# Altium PCB PCB1.PcbDoc
Units mil, origin at the board's own origin, x right, y up, seen from the top; angles counter-clockwise.
Board outline 4535 x 2760 mil, 2 copper layers (Top Layer, Bottom Layer); 63 components, 60 nets, 319 pads, 63 vias.
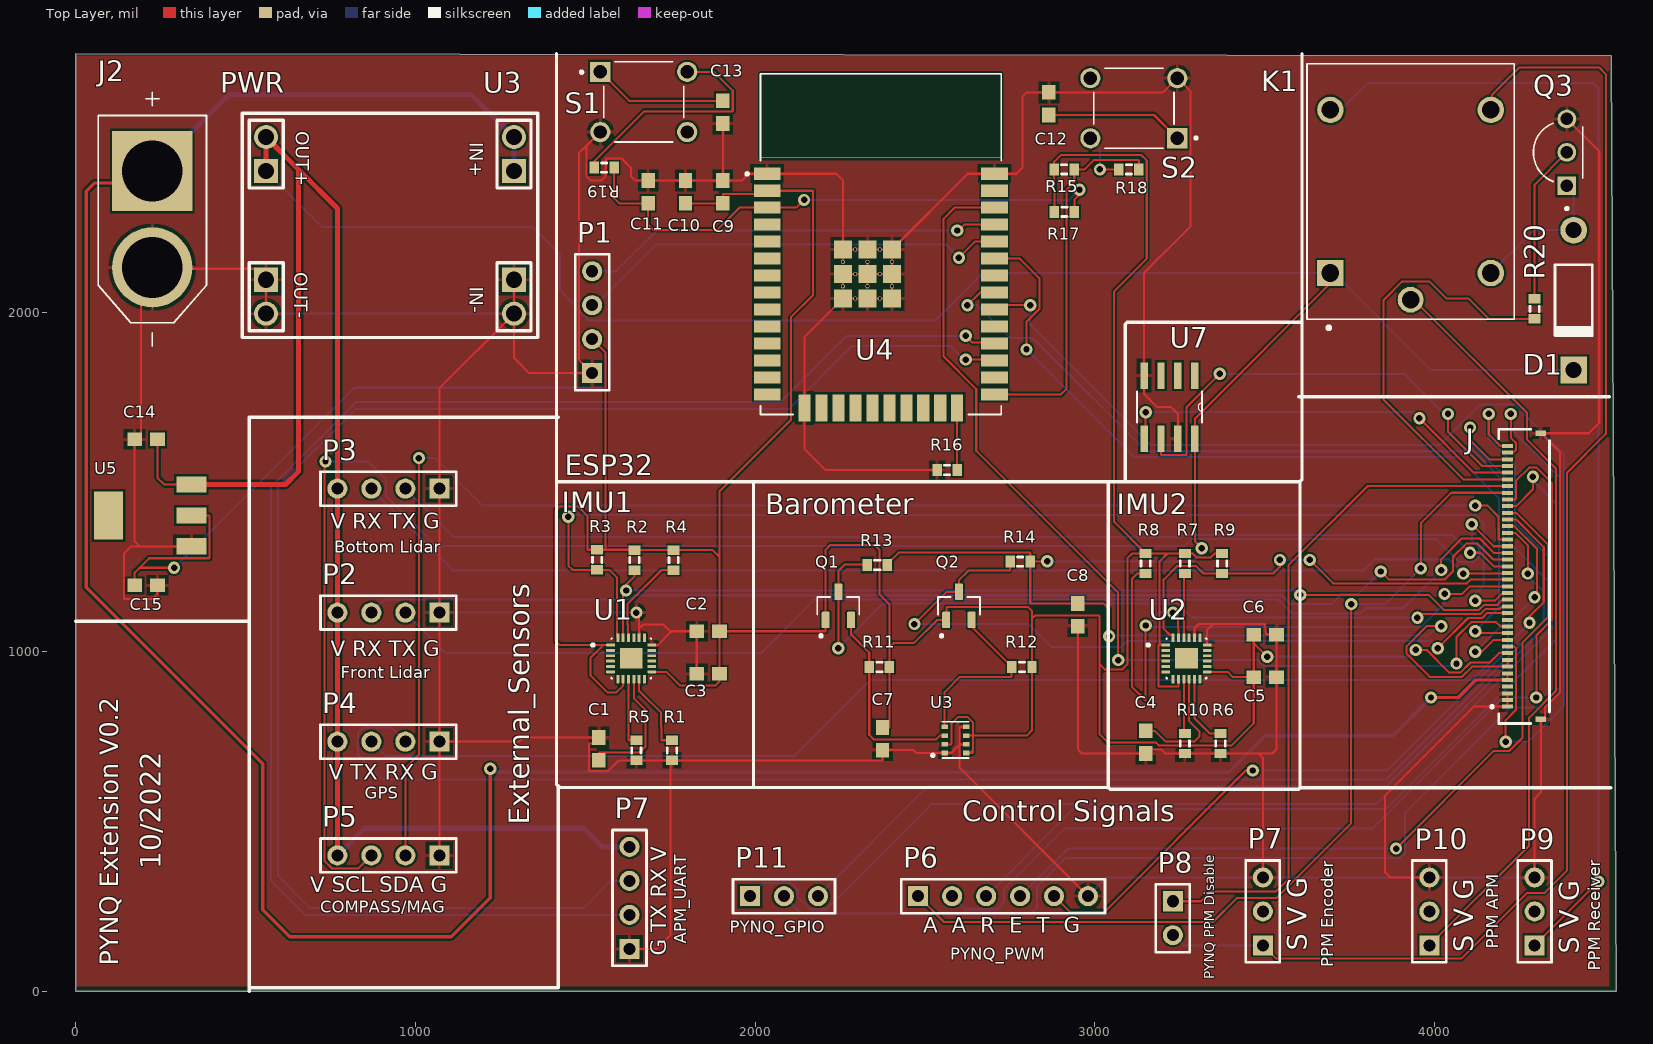
[diagram p0: Top Layer view]
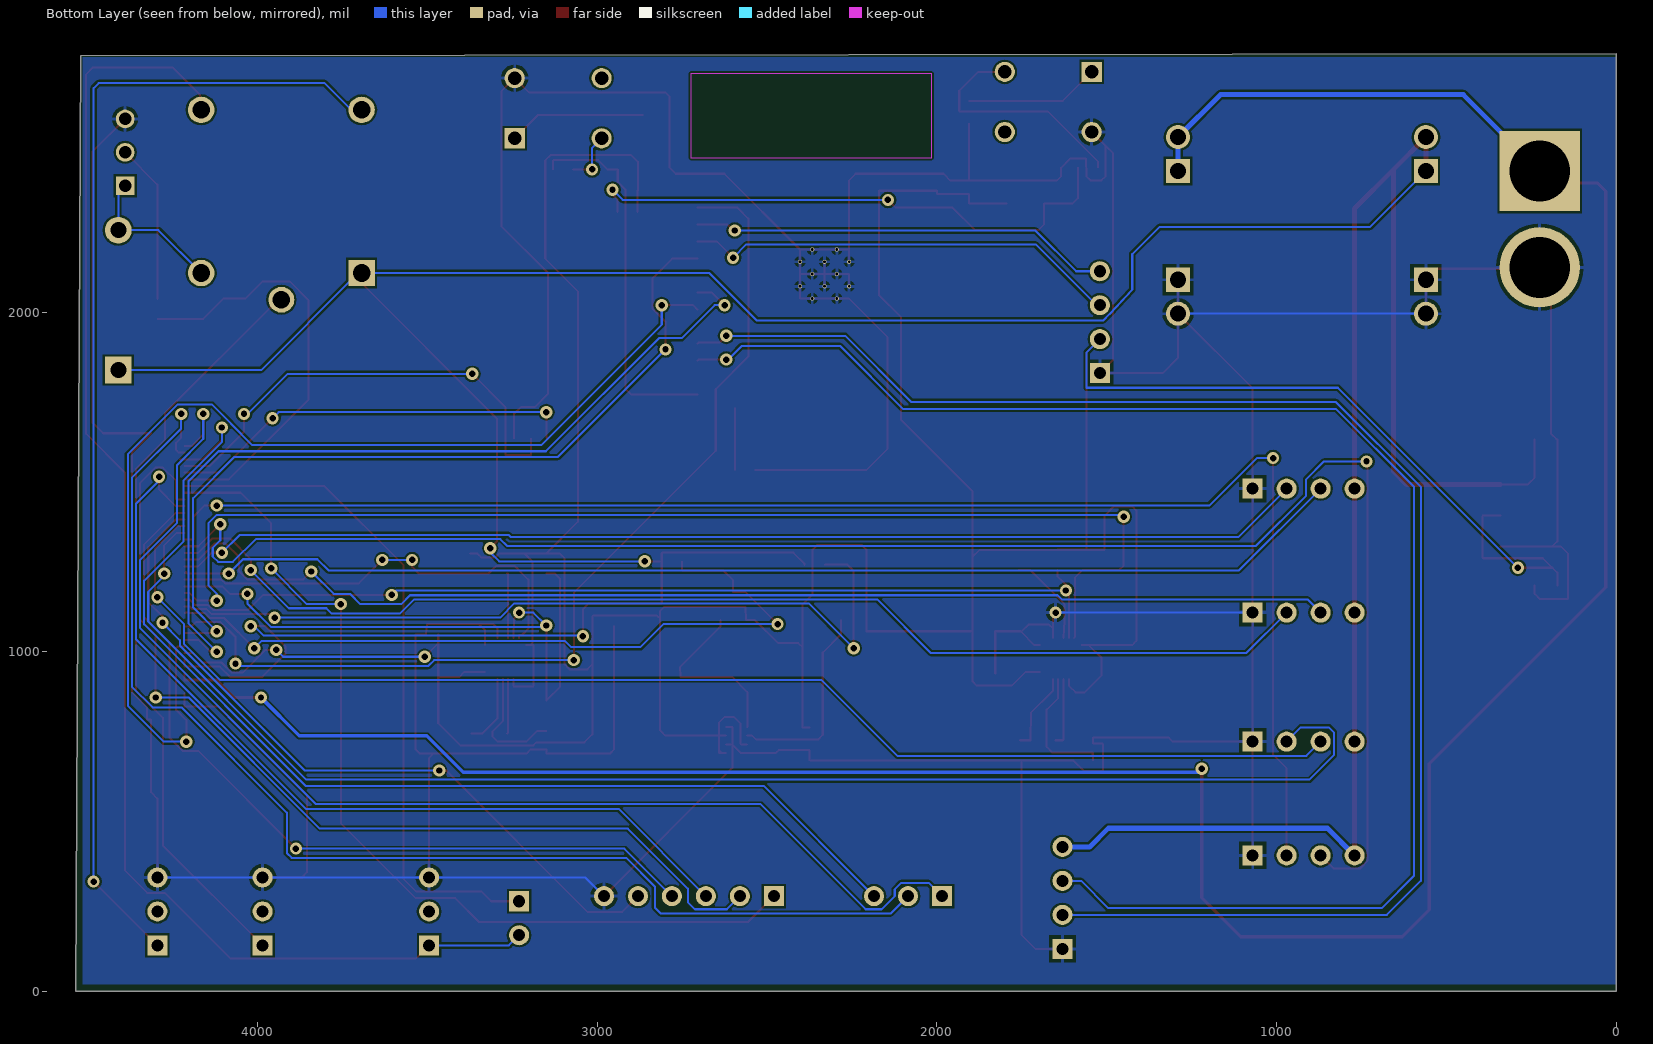
[diagram p1: Bottom Layer view, seen from below]

## Layer stack, top to bottom
Top Solder: solder mask 0.4, Solder Resist, Dk 3.5
Top Layer: signal copper 1.4
Dielectric 1: dielectric 12.6, FR-4, Dk 4.8
Bottom Layer: signal copper 1.4
Bottom Solder: solder mask 0.4, Solder Resist, Dk 3.5

## Board outline
0,0 4535,0 4520,2755 0,2760

## Design rules (kind name [scope] priority, off if disabled: settings)
Clearance [All] p1: gap=6 ignorepadtopadclearanceinfootprint=FALSE except(0: Arc-Hole Track-Hole SMDPad-Hole THPad-Hole Via-Hole Fill-Hole Poly-Hole Region-Hole Text-Hole)
MinimumSolderMaskSliver [All] p1: minsoldermaskwidth=3.8
PolygonConnect [All] p1: connectstyle=Relief reliefconductorwidth=10 reliefentries=4 polygonreliefangle="90 Angle" airgapwidth=10
RoomDefinition Sheet1 [InComponentClass('Sheet1')] p1 off: confinementstyle=ConfineIn formatcopy=TRUE lockcomponents=FALSE outline 4665,1570 8030,1570 8030,2485 4665,2485
RoomDefinition ESP32 [InComponentClass('ESP32')] p2 off: confinementstyle=ConfineIn formatcopy=TRUE lockcomponents=FALSE outline 4665,0 8390,0 8390,1160 4665,1160
RoomDefinition Voltage_Regulators [InComponentClass('Voltage_Regulators')] p3 off: confinementstyle=ConfineIn formatcopy=TRUE lockcomponents=FALSE outline 4665,2535 6880,2535 6880,3630 4665,3630
RoomDefinition Sensors [InComponentClass('Sensors')] p4 off: confinementstyle=ConfineIn formatcopy=TRUE lockcomponents=FALSE outline 4665,1210 10145,1210 10145,1520 4665,1520
RoutingVias [All] p1: holewidth=19 width=36 viastyle="Through Hole" minholewidth=18 minwidth=33 maxholewidth=28 maxwidth=50
SilkToSilkClearance [All] p1: silktosilkclearance=5
SilkToSolderMaskClearance [IsPad] p1: minsilkscreentomaskgap=3 clearancetoexposedcopper=TRUE
SolderMaskExpansion [All] p1: expansion=4 istentingtop=FALSE
Width [All] p1: maxlimit=15 minlimit=4.5 preferedwidth=6 minimp=50.000000 maximp=50.000000 favimp=50.000000
27 further rules are at their usual default settings.

## Classes and differential pairs
component class Voltage_Regulators: C14 C15 J2 U3 U5
component class Sheet1: D1 J K1 P2 P3 P4 P5 P6 P7 P8 P9 P10 P11 Q3 R20
component class Sensors: C1 C2 C3 C4 C5 C6 C7 C8 Q1 Q2 R1 R2 R3 R4 R5 R6 R7 R8 R9 R10 R11 R12 R13 R14 U1 U2 U3 U7
component class ESP32: C9 C10 C11 C12 C13 P1 R15 R16 R17 R18 R19 S1 S2 U4

## Components (designator, comment, footprint, x,y, rotation, side; value= is the part's Value field where it differs from the comment)
C1 "0.1uF" CAPC1608X90 1540,713.46 r90 top
C2 "0.1uF" CAPC1608X90 1861.53,1060 r180 top
C3 "0.01uF" CAPC1608X90 1861.54,935 r180 top
C4 "0.1uF" CAPC1608X90 3150,733.46 r270 top
C5 "0.01uF" CAPC1608X90 3501.54,925 r0 top
C6 "0.1uF" CAPC1608X90 3501.54,1050 r0 top
C7 "10uF" CAPC1608X90 2375,743.46 r270 top
C8 "10uF" CAPC1608X90 2950,1108.47 r270 top
C9 "100uF/6.3V" CAPC1608X90 1905,2353.47 r270 top
C10 "1uF/10V" CAPC1608X90 1795,2353.46 r270 top
C11 "0.1uf" CAPC1608X90 1685,2353.46 r90 top
C12 "0.1uf" CAPC1608X90 2865,2613.46 r90 top
C13 "0.1uf" CAPC1608X90 1905,2588.46 r270 top
C14 "10uF" CAPC1608X90 206.54,1625 r180 top
C15 "10uF" CAPC1608X90 206.54,1195 r0 top
D1 "Diode 1N4001" DO-41 4410,2035 r270 top
J "FFC2B28-40-G" GCT_FFC2B28-40-G 4264.21,1221.73 r90 top
J2 "XT60-M" AMASS_XT60-M 225,2273.27 r270 top
K1 "SRD-05VDC-SL-C" RELAY_SRD-05VDC-SL-C 3930,2355 r90 top
P1 "ESP_UART" HDR1X4 1520,1820 r90 top
P2 "Lidar_F" HDR1X4 1070,1115 r180 top
P3 "Lidar_B" HDR1X4 1070,1480 r180 top
P4 "GPS_Prim" HDR1X4 1070,735 r180 top
P5 "Compass_Prim" HDR1X4 1070,400 r180 top
P6 "PWM_PYNQ" HDR1X6 2480,280 r0 top
P7 "APM_UART" HDR1X4 1630,125 r90 top
P7 "PPM_PYNQ_Encoder" HDR1X3 3495,135 r90 top
P8 "PPM_Jumper" HDR1X2 3230,265 r270 top
P9 "PPM_REC" HDR1X3 4295,135 r90 top
P10 "PPM_OUT" HDR1X3 3985,135 r90 top
P11 "GPIO" HDR1X3 1985,280 r0 top
Q1 "BSS138" SOT95P240X111-3N 2245,1135 r90 top
Q2 "BSS138" SOT95P240X111-3N 2600,1135 r90 top
Q3 "BC547B" TO92250P510H770-3 4364.21,2470 r90 top
R1 "Res3" J1-0603 1755,709.53 r90 top value=10K
R2 "Res3" J1-0603 1645,1269.53 r270 top value=10K
R3 "Res3" J1-0603 1535,1270.47 r270 top value=10K
R4 "Res3" J1-0603 1760,1269.53 r270 top value=10K
R5 "Res3" J1-0603 1650,709.53 r90 top value=10K
R6 "Res3" J1-0603 3370,729.53 r90 top value=10K
R7 "Res3" J1-0603 3265,1259.53 r270 top value=10K
R8 "Res3" J1-0603 3150,1259.53 r270 top value=10K
R9 "Res3" J1-0603 3375,1259.53 r270 top value=10K
R10 "Res3" J1-0603 3265,729.53 r90 top value=10K
R11 "Res3" J1-0603 2365.47,955 r180 top value=10K
R12 "Res3" J1-0603 2785.47,955 r180 top value=10K
R13 "Res3" J1-0603 2359.53,1255 r0 top value=10K
R14 "Res3" J1-0603 2780.47,1265 r0 top value=10K
R15 "Res3" J1-0603 2910,2420 r180 top value=10K
R16 "Res3" J1-0603 2565.47,1535 r180 top value="5k(Optional-internal pull down)"
R17 "Res3" J1-0603 2910.47,2295 r180 top value=10K(1%)
R18 "Res3" J1-0603 3100.47,2420 r0 top value=470R(1%)
R19 "Res3" J1-0603 1555.47,2425 r0 top value=470R(1%)
R20 "0603" J1-0603 4295,2009.53 r90 top value=10K
S1 "TS02-66-73-BK-100-SCR-D" SW_TS02-66-73-BK-100-SCR-D 1672.05,2618.58 r0 top
S2 "TS02-66-73-BK-100-SCR-D" SW_TS02-66-73-BK-100-SCR-D 3115,2600 r180 top
U1 "MPU-9250" QFN40P300X300X105-25N 1635,980 r0 top
U2 "MPU-9250" QFN40P300X300X105-25N 3270,980 r0 top
U3 "Component_1" PCBComponent_1 1220,2270 r180 top
U3 "BMP280" XDCR_BMP280 2590,740 r180 top
U4 "ESP32-WROOM-32" MODULE_ESP32-WROOM-32 2370,2200 r0 top
U5 "AMS1117-3.3" SOT223 218,1401 r180 top
U7 "24LC256-I/SN" SOIC127P600X175-8N 3220,1720 r270 top

## Footprints (in the part's own frame and the unit in brackets; to place one, negate y for a bottom-side part, rotate by r counter-clockwise, add the part's x,y. Pads: shape width x height; smd on the part's side, far side on the other; paste and mask are expansions set on the pad)
AMASS_XT60-M [mm]
  round 6 hole 4.55: N(3.6,0)
  rect 6x6 hole 4.55: P(-3.6,0)
  silkscreen extent -9.5,-4.05 9.5,4.05, body extent -4.05,0 4.05,20.5, height 7.75
CAPC1608X90 [mm]
  rect 1.1x1 smd: 1(-0.85,0) 2(0.85,0)
DO-41 [mm] "Diode, Axial; Body 5.2 x 2.7 mm (LxDia. max), Lead Dia. 0.86 mm (max)"
  round 2 hole 1.2: 1(-5.23,0)
  rect 2x2 hole 1.2: 2(5.23,0)
  silkscreen extent -2.65,-1.4 2.75,1.4
GCT_FFC2B28-40-G [mm]
  rect 0.3x0.8 smd: 1(-9.75,1.25) 2(-9.25,1.25) 3(-8.75,1.25) 4(-8.25,1.25) 5(-7.75,1.25) 6(-7.25,1.25) 7(-6.75,1.25) 8(-6.25,1.25) 9(-5.75,1.25) 10(-5.25,1.25) 11(-4.75,1.25) 12(-4.25,1.25) 13(-3.75,1.25) 14(-3.25,1.25) 15(-2.75,1.25) 16(-2.25,1.25) 17(-1.75,1.25) 18(-1.25,1.25) 19(-0.75,1.25) 20(-0.25,1.25) 21(0.25,1.25) 22(0.75,1.25) 23(1.25,1.25) 24(1.75,1.25) 25(2.25,1.25) 26(2.75,1.25) 27(3.25,1.25) 28(3.75,1.25) 29(4.25,1.25) 30(4.75,1.25) 31(5.25,1.25) 32(5.75,1.25) 33(6.25,1.25) 34(6.75,1.25) 35(7.25,1.25) 36(7.75,1.25) 37(8.25,1.25) 38(8.75,1.25) 39(9.25,1.25) 40(9.75,1.25)
  rect 0.4x0.8 smd: S1(-10.7,-1.25) S2(10.7,-1.25)
  silkscreen extent -11,-1.9 11,2.5
HDR1X2 [mm] "Connector; Header; 2 Position"
  rect 1.5x1.5 hole 0.9: 1(0,0)
  round 1.5 hole 0.9: 2(2.54,0)
  silkscreen extent -1.27,-1.27 3.81,1.27
HDR1X3 [mm] "Connector; Header; 3 Position"
  rect 1.5x1.5 hole 0.9: 1(0,0)
  round 1.5 hole 0.9: 2(2.54,0) 3(5.08,0)
  silkscreen extent -1.27,-1.27 6.35,1.27
HDR1X4 [mm] "Connector; Header; 4 Position"
  rect 1.5x1.5 hole 0.9: 1(0,0)
  round 1.5 hole 0.9: 2(2.54,0) 3(5.08,0) 4(7.62,0)
  silkscreen extent -1.27,-1.27 8.89,1.27
HDR1X6 [mm] "Connector; Header; 6 Position"
  rect 1.5x1.5 hole 0.9: 1(0,0)
  round 1.5 hole 0.9: 2(2.54,0) 3(5.08,0) 4(7.62,0) 5(10.16,0) 6(12.7,0)
  silkscreen extent -1.27,-1.27 13.97,1.27
J1-0603 [mm] "Chip Resistor, Body 1.6x0.8mm, IPC High Density"
  rect 0.7x0.9 smd: 1(-0.75,0) 2(0.75,0)
  silkscreen extent -0.2,-0.35 0.2,0.35, body extent -0.85,-0.48 0.85,0.48, height 0.9
MODULE_ESP32-WROOM-32 [mm]
  rect 2x0.9 smd: 1(-8.5,5.26) 2(-8.5,3.99) 3(-8.5,2.72) 4(-8.5,1.45) 5(-8.5,0.18) 6(-8.5,-1.09) 7(-8.5,-2.36) 8(-8.5,-3.63) 9(-8.5,-4.9) 10(-8.5,-6.17) 11(-8.5,-7.44) 12(-8.5,-8.71) 13(-8.5,-9.98) 14(-8.5,-11.25) 25(8.5,-11.25) 26(8.5,-9.98) 27(8.5,-8.71) 28(8.5,-7.44) 29(8.5,-6.17) 30(8.5,-4.9) 31(8.5,-3.63) 32(8.5,-2.36) 33(8.5,-1.09) 34(8.5,0.18) 35(8.5,1.45) 36(8.5,2.72) 37(8.5,3.99) 38(8.5,5.26)
  rect 0.9x2 smd: 15(-5.715,-12.25) 16(-4.445,-12.25) 17(-3.175,-12.25) 18(-1.905,-12.25) 19(-0.635,-12.25) 20(0.635,-12.25) 21(1.905,-12.25) 22(3.175,-12.25) 23(4.445,-12.25) 24(5.715,-12.25)
  rect 1.33x1.33 smd: 39_1(-2.835,-0.405) 39_2(-1,-0.405) 39_3(0.835,-0.405) 39_4(-2.835,-2.24) 39_5(-1,-2.24) 39_6(0.835,-2.24) 39_7(-2.835,-4.075) 39_8(-1,-4.075) 39_9(0.835,-4.075)
  round 0.3 hole 0.2: 39_10(-1.917,-0.405) 39_11(-0.082,-0.405) 39_12(-2.835,-1.322) 39_13(-1,-1.322) 39_14(0.835,-1.322) 39_15(-1.917,-2.24) 39_16(-0.082,-2.24) 39_17(-2.835,-3.157) 39_18(-1,-3.157) 39_19(0.835,-3.157) 39_20(-1.917,-4.075) 39_21(-0.082,-4.075)
  Keep-Out Layer region: 9,6.45 -9,6.45 -9,12.75 9,12.75
  Keep-Out Layer region: 9,6.45 -9,6.45 -9,12.75 9,12.75
  silkscreen extent -10.1,-12.75 9,12.75
PCBComponent_1 [mm]
  round 1.8 hole 1.2: 1(-1.778,6.985) 4(-1.778,-6.223) 5(16.764,6.985) 8(16.764,-6.223)
  rect 1.8x1.8 hole 1.2: 2(-1.778,4.445) 3(-1.778,-3.683) 6(16.764,4.445) 7(16.764,-3.683)
  silkscreen extent -3.56,-8 18.54,8.76
QFN40P300X300X105-25N [mm]
  rrect25% 0.64x0.22 smd: 1(-1.545,1) 2(-1.545,0.6) 3(-1.545,0.2) 4(-1.545,-0.2) 5(-1.545,-0.6) 6(-1.545,-1) 13(1.545,-1) 14(1.545,-0.6) 15(1.545,-0.2) 16(1.545,0.2) 17(1.545,0.6) 18(1.545,1)
  rrect25% 0.22x0.64 smd: 7(-1,-1.545) 8(-0.6,-1.545) 9(-0.2,-1.545) 10(0.2,-1.545) 11(0.6,-1.545) 12(1,-1.545) 19(1,1.545) 20(0.6,1.545) 21(0.2,1.545) 22(-0.2,1.545) 23(-0.6,1.545) 24(-1,1.545)
  rect 1.7x1.54 smd paste-2: 25(0,0)
  silkscreen extent -2.96,-1.5 1.5,1.5, body extent -1.5,-1.5 1.5,1.5, height 1
RELAY_SRD-05VDC-SL-C [mm]
  rect 1.98x1.98 hole 1.32: A1(-6.1,6)
  round 1.98 hole 1.32: A2(-6.1,-6) NC(6.1,6) NO(6.1,-6)
  round 1.935 hole 1.29: COM(-8.1,0)
  silkscreen extent -10.3,-7.75 9.55,7.75
SOIC127P600X175-8N [mil]
  rect 78x22 smd: 1(-93,75) 2(-93,25) 3(-93,-25) 4(-93,-75) 5(93,-75) 6(93,-25) 7(93,25) 8(93,75)
  silkscreen extent -46,-96 46,96
SOT95P240X111-3N [mm]
  rrect25% 1.23x0.6 smd: 1(-1.06,0.95) 2(-1.06,-0.95) 3(1.06,0)
  silkscreen extent -2.35,-1.57 0.65,1.57
SOT223 [mil]
  rect 88x48 smd: 1(-122,91) 2(-122,0) 3(-122,-91)
  rect 86.61x141.73 smd: 4(122.01,0)
SW_TS02-66-73-BK-100-SCR-D [mm]
  rect 1.508x1.508 hole 1: 1(-3.25,2.25)
  round 1.508 hole 1: 2(3.25,2.25) 3(-3.25,-2.25) 4(3.25,-2.25)
  silkscreen extent -4.75,-3 3,3
TO92250P510H770-3 [mm]
  rect 1.4x1.4 hole 0.93: 1(-2.5,-0.655)
  round 1.4 hole 0.93: 2(0,-0.655) 3(2.5,-0.655)
  silkscreen extent -4.3,-1.85 2.18,1.85
XDCR_BMP280 [mm]
  rect 0.5x0.35 smd: 1(0.8,0.975) 2(0.8,0.325) 3(0.8,-0.325) 4(0.8,-0.975) 5(-0.8,-0.975) 6(-0.8,-0.325) 7(-0.8,0.325) 8(-0.8,0.975)
  silkscreen extent -1,-1.35 1.79,1.35

## Part data
C1 C2 C3 C4 C5 C6 C7 C8 C9 C10 C11 C12 C13 C14 C15: library part C0603C104K5RACTU, "0.1ÂµF Â±10% 50V Ceramic Capacitor X7R 0603 (1608 Metric)", Package="0603 Kemet", Check_prices=https://www.snapeda.com/parts/C0603C104K5RACTU/KEMET/view-part/52584/?ref=eda, Digi-Key_Part_Number=399-5089-1-ND, MF=KEMET, MP=C0603C104K5RACTU, Purchase-URL=https://pricing.snapeda.com/search/part/C0603C104K5RACTU/?ref=eda, SnapEDA_Link=https://www.snapeda.com/parts/C0603C104K5RACTU/KEMET/view-part/52584/?ref=snap
D1: "1 Amp General Purpose Rectifier", Code_JEDEC=DO-204-AL, ComponentLink1Description="Manufacturer Link", ComponentLink1URL=http://www.fairchildsemi.com/, ComponentLink2Description=Datasheet, ComponentLink2URL=http://www.fairchildsemi.com/ds/1N%2F1N4001.pdf, DatasheetVersion=1998, LatestRevisionDate=17-Jul-2002, LatestRevisionNote="Re-released for DXP Platform.", PackageDescription="Diode, Axial; Body 5.2 x 2.7 mm (LxDia. max), Lead Dia. 0.86 mm (max)", PackageReference=DO-41, PackageVersion=Aug-1999, Published=8-Jun-2000, Publisher="Altium Limited"
J: "40 Position FFC, FPC Connector Contacts, Top and Bottom 0.020 _0.50mm_ Surface Mount, Right Angle", Package="Package Analog Devices", Availability=Unavailable, MF="Global Connector Technology", MP=FFC2B28-40-G, Price=None, SnapEDA_Link=https://www.snapeda.com/parts/FFC2B28-40-G/Global%20Connector%20Technology/view-part/4223068/?ref=snap
J2: "Plug; DC supply; XT60; male; PIN: 2; for cable; soldered; 30A; 500V", Package=Package, Availability="Not in stock", Check_prices=https://www.snapeda.com/parts/XT60-M/AMASS/view-part/?ref=eda, MF=AMASS, MP=XT60-M, Price=None, SnapEDA_Link=https://www.snapeda.com/parts/XT60-M/AMASS/view-part/?ref=snap
K1: "5V Trigger Relay Module For Arduino And Raspberry Pi 5V Trigger Relay Module For Arduino And Raspberry Pi", Package=None, Availability=Unavailable, MP=SRD-05VDC-SL-C, Price=None
P1 P2 P3 P4 P5 P7: library part "Header 4", "Header, 4-Pin", LatestRevisionDate=17-Jul-2002, LatestRevisionNote="Re-released for DXP Platform.", Publisher="Altium Limited"
P6: library part "Header 6", "Header, 6-Pin", LatestRevisionDate=17-Jul-2002, LatestRevisionNote="Re-released for DXP Platform.", Publisher="Altium Limited"
P7 P9 P10 P11: library part "Header 3", "Header, 3-Pin", LatestRevisionDate=17-Jul-2002, LatestRevisionNote="Re-released for DXP Platform.", Publisher="Altium Limited"
P8: library part "Header 2", "Header, 2-Pin", LatestRevisionDate=17-Jul-2002, LatestRevisionNote="Re-released for DXP Platform.", Publisher="Altium Limited"
Q1 Q2: "N-Channel 50V 220mA (Ta) 360mW (Ta) Surface Mount SOT-23-3", Package=None, Availability=Unavailable, MP=BSS138, Price=None
Q3: "<a href=\"https://pricing.snapeda.com/parts/BC337-16%20A1/Taiwan%20Semiconductor/view-part?ref=eda\">Check availability</a> <a href=\"https://pricing.snapeda.com/parts/BC337-16%20A1/Taiwan%20Semiconductor/view-part?ref=eda\">Check availability</a>", Package=None, Availability=Unavailable, MP=BC547B, Price=None
R1 R2 R3 R4 R5 R6 R7 R8 R9 R10 R11 R12 R13 R14 R15 R16 R17 R18 R19: "Resistor", LatestRevisionDate=29-May-2009, LatestRevisionNote="IPC-7351 Footprint Added.", PackageDescription="Chip Resistor", PackageReference=J1-0603, Published=8-Jun-2000, Publisher="Altium Limited"
R20: library part Res3, "Resistor", LatestRevisionDate=29-May-2009, LatestRevisionNote="IPC-7351 Footprint Added.", PackageDescription="Chip Resistor", PackageReference=J1-0603, Published=8-Jun-2000, Publisher="Altium Limited"
S1 S2 U4: Package=None, Availability=Unavailable, Price=None
  S1 S2: MF="{'manufacturer': u'CUI'}", MP=TS02-66-73-BK-100-SCR-D
  U4: MP=ESP32-WROOM-32
U1 U2: "MPU-9250 series Accelerometer, Gyroscope, Humidity, Magnetometer, Pressure, Temperature Sensor Evaluation Board", Package="TFQFN-24 TDK InvenSense", Availability="In Stock", Check_prices=https://www.snapeda.com/parts/MPU-9250/TDK+InvenSense/view-part/?ref=eda, MF="TDK InvenSense", MP=MPU-9250, Price=None, Purchase-URL=https://pricing.snapeda.com/search/part/MPU-9250/?ref=eda, SnapEDA_Link=https://www.snapeda.com/parts/MPU-9250/TDK+InvenSense/view-part/?ref=snap
U3: "BMP280 Absolute Barometric Pressure Sensor for Battery Powered Devices 2 x 2.5mm", Package=None, Availability=Unavailable, MP=BMP280, Price=None
U7: "EEPROM Memory IC 256Kb _32K x 8_ IÂ²C 400kHz 900ns 8-SOIC", Package="SOIC-8 Microchip", Availability=Unavailable, MF=Microchip, MP=24LC256-I/SN, Price=None, SnapEDA_Link=https://www.snapeda.com/parts/24LC256-I/SN/Microchip/view-part/9771/?ref=snap

## Via types
v1: diameter 36, hole 19, Top Layer to Bottom Layer, 63 vias

## Nets (pads, with @x,y where several pads share a name; then routed paths per layer and width w, separated by ;. In a path a pad name is that pad's centre, name@x,y a point inside that pad or via, vN(x,y) a via of type N, cw(c..) or ccw(c..) an arc to the next point about the centre after c; other vN are vias at no path point)
+3.3V: C2.1 C3.1 C5.1 C6.1 C7.1 C9.2 C10.2 C15.1 J.9 P1.2 Q1.1 Q2.1 R2.1 R3.1 R4.1 R7.1 R8.1 R9.1 R11.1 R12.1 R15.2 R17.2 U1.1 U1.8 U1.13 U2.1 U2.8 U2.13 U3.2@2558.5,727.2 U3.6@2621.5,752.8 U3.8@2621.5,701.61 U4.2 U5.2 | length 14190.5
  Top Layer w6: C15.1 173.07,1232.57 187.5,1247 ; v1(289,1247) 187.5,1247 ; U5.2 392,1401 393,1400 393,1276 392,1275 215.5,1275 187.5,1247 ; P1.2 1559,1881 1559,1301 1558,1300 ; U1.1 1553,1019.37 ; U1.8 1611.38,900 1591.38,880 1565,880 1515,930 1515,981.37 1553,1019.37 ; U1.13 1738.37,940.63 1779,900 1882.5,900 1895,912.5 C3.1 C2.1 ; C10.2 C9.2 1905,2346 1906,2347 1999,2347 1999,2357.09 U4.2 2170,2357.09 2171,2356.09 2171,2050 2105,1984 2105,1682 1895,1472 1895,1279.06 ; C7.1 2395,776.93 R11.1 2395,1012.5 ; U3.2@2558.5,727.2 2577,727.2 2578,728.2 2578,787.5 2598.5,808 2625,808 2641,792 2641,752.8 ; U3.8@2621.5,701.61 2633,701.61 ; U3.6@2621.5,752.8 2640,752.8 ; R17.2 2880.94,2357 2880.47,2357.47 R15.2 2880.47,2442.47 2900,2462 3137.5,2462 3153,2446.5 3153,2157 3057,2061 3057,1382.06 R8.1 ; U2.1 3196.5,1019.37 ; U2.8 3246.38,898.43 3245,897.06 3188.94,897.06 3187,899 3187,1018.37 3188,1019.37 3196.5,1019.37 ; U2.13 3391,940.63 3406.63,925 C5.1 ; R9.1 3353.56,1289.06 3342,1277.5 3299.56,1277.5 3288,1289.06 R7.1 3214.15,1289.06 ; C6.1 3468.07,1025 ; v1(3508.07,985) 3468.07,1025 ; v1(3945,1005) 3976.82,1005 4043.82,938 4076.18,938 4106.18,968 4163.5,968 4190.85,995.35 J.9 ; 1553,1019.37 1425,1019.37 1412.5,1031.87 1412.5,1415 1425,1427.5 1478.5,1427.5 1506,1400 1507,1300 R3.1 1558,1300 ; 1558,1300 1644.06,1300 R2.1 R4.1 1875,1299.06 1895,1279.06 ; C2.1 1895,1279.06 ; C2.1 2206.6,1060 2207.6,1061 Q1.1 2207.6,1300 2221.6,1314 2352,1314 2366,1300 2366,1169 2395,1140 2395,1012.5 ; 2395,1012.5 2407.5,1025 2467.5,1025 2535.77,1093.27 Q2.1 2563.6,1131 2804,1131 2815,1120 2815,1097 ; 2633,701.61 2640,701.61 2641,702.61 2641,709.61 ; 2633,701.61 2641,709.61 ; 2640,752.8 2641,751.8 ; 2640,752.8 2641,752.8 ; 2641,709.61 2641,751.8 ; 2641,751.8 2641,752.8 ; 2641,752.8 2800,752.8 2815,767.8 R12.1 2815,1097 ; 2815,1097 2824,1106 3012.5,1106 3014.53,1103.97 3014.53,962.5 ; 3014.53,962.5 3014.53,756.47 3038,733 3179,733 3188,724 3403,724 3468.07,789.07 C5.1 ; 3014.53,962.5 3029.03,948 3081.5,948 3096,962.5 3096,1275 3110.06,1289.06 R8.1 ; R8.1 3214.15,1289.06 ; 3196.5,1019.37 3191,1024.87 3191,1265.91 3214.15,1289.06 ; C5.1 3468.07,1025
  Bottom Layer w6: v1(289,1247) 819,1777 1559,1777 1559,1881 P1.2 ; v1(3508.07,985) 3925,985 v1(3945,1005)
+5V: C8.1 C14.1 D1.2 J.7 J.8 K1.A1 P2.4 P3.4 P4.4 P5.4 P7.4 R13.2 R14.2 U3.7@560,2415 U3.8@560,2515 U5.3 U7.8 | length 12819.6
  Top Layer w6: C14.1 240,1512.5 260.5,1492 U5.3 ; R13.2 2389.06,1258 2422.78,1291.72 2809,1291.72 2810,1290.72 R14.2@2810,1266 ; v1(2860,1266) R14.2@2810,1266 ; v1(3042,1045) 3042,1125 3025.07,1141.93 C8.1 2810.07,1141.93 2810,1142 R14.2 R14.2@2810,1266 ; v1(3315,1304.5) 3295,1324.5 U7.8 3295,1686.06 K1.A1@3713.78,2104.84 ; v1(4020,1075) 3976.82,1075 3918,1016.18 3918,993.82 3985.82,926 4081.15,926 4111.14,955.98 J.7 J.8
  Top Layer w15: U5.3 617,1492 655,1530 655,2420 ; U3.7@560,2415 560,2515 655,2420 ; P5.4 P4.4 P2.4 P3.4 770,2305 655,2420
  Bottom Layer w6: U3.7@560,2415 725,2250 1345,2250 1424.69,2170.31 1424.69,2065.69 1491.83,1993.72 1510.51,1975 2530,1975 2669.84,2114.84 K1.A1 ; v1(2860,1266) 3289.05,1266 3315,1291.95 v1(3315,1304.5) ; v1(3042,1045) 3044,1047 3982,1047 4010,1075 v1(4020,1075) ; K1.A1@3713.78,2104.84 3989.53,1829.09 D1.2
  Bottom Layer w15: P5.4 850,480 1495,480 1550,425 P7.4
BMP_SCK: Q2.2 R12.2 U3.4@2558.5,778.39 | length 535.1
  Top Layer w6: U3.4@2558.5,778.39 2558,778.39 2558,881 2603,926 2754.94,926 R12.2 2755.94,955.11 2637.4,1073.65 Q2.2
BMP_SCL: J.15 Q2.3 R14.1 | length 2227.6
  Top Layer w6: v1(2469,1081) 2564,1176 2600,1176 Q2.3 2600,1210 2629,1239 2749.94,1239 R14.1 ; v1(4010,1010) 4099,1099 4141.12,1099 4156.12,1114 4202.43,1114 4203.43,1115 4213.46,1115 J.15
  Bottom Layer w6: v1(2469,1081) 2805,1081 2873,1013 3076.36,1013 3095.36,1032 3988,1032 v1(4010,1010)
BMP_SDA: J.16 Q1.3 R13.1 | length 2377.7
  Top Layer w6: v1(2245,1010) Q1.3 2245,1237.5 2264.02,1256.52 2330,1256.52 R13.1 ; v1(3950,1100) 3961,1111 4136.15,1111 4151.15,1126 4193.15,1126 4200.3,1133.15 J.16
  Bottom Layer w6: v1(2245,1010) 2377,1142 3244.18,1142 3286.12,1100.06 3949.94,1100.06 v1(3950,1100)
BMP_SDI: Q1.2 R11.2 U3.3@2558.5,752.8 | length 593.7
  Top Layer w6: Q1.2 2282.4,1050.54 2335.94,997 R11.2 2335.94,755.06 2350,741 2532.2,741 2544,752.8 U3.3@2558.5,752.8
comp_scl: J.25 P5.3 | length 5148.5
  Top Layer w6: v1(735,1560) 731.47,1556.47 731.47,384.04 754.04,361.47 831.47,361.47 P5.3 ; v1(4110,1375) 4174.68,1310.32 J.25
  Bottom Layer w6: v1(735,1560) 860,1560 912.5,1507.5 912.5,1459.5 1061,1311 3265,1311 3285.5,1331.5 4005.32,1331.5 4072.7,1264.12 4116.25,1264.12 4132.06,1279.93 4132.06,1305.62 4110,1327.68 v1(4110,1375)
comp_sda: J.26 P5.2 | length 4529.8
  Top Layer w6: P5.2 970,657 1010,697 v1(1010,1570) ; v1(4120,1430) 4156.5,1430 4188.5,1398 4189.5,1330 J.26
  Bottom Layer w6: v1(1010,1570) 1058,1570 1198,1430 v1(4120,1430)
EEPROM_SCL: J.37 U7.6 | length 1391.3
  Top Layer w6: U7.6 3195,1580 3196,1579 3269,1579 3270,1580 3270,1720 v1(3368,1818) ; v1(4040,1700) 4040,1648 4141.46,1546.54 J.37
  Bottom Layer w6: v1(3368,1818) 3911.54,1818 4029.54,1700 v1(4040,1700)
EEPROM_SDA: J.36 U7.5 | length 1218.9
  Top Layer w6: U7.5 3150,1632 v1(3150,1705) ; v1(3956,1687) 4116.15,1526.85 J.36
  Bottom Layer w6: v1(3150,1705) 3938,1705 v1(3956,1687)
EN: C11.1 R17.1 R19.2 U4.3 | length 1655.5
  Top Layer w6: R19.2 1585,2335 1600,2320 C11.1 1685,2257 1700,2242 1888.91,2242 1954,2307.09 U4.3 2121.09,2307.09 v1(2144,2330) ; R17.1 2940,2330 2955,2345 v1(2955,2360)
  Bottom Layer w6: v1(2144,2330) 2925,2330 v1(2955,2360)
ESP_DEBUG_RXD: P1.3 U4.34 | length 1291.5
  Top Layer w6: v1(2600,2160) 2647.09,2207.09 U4.34
  Bottom Layer w6: P1.3@1525,2015 1708.96,2198.96 2561.04,2198.96 v1(2600,2160)
ESP_DEBUG_TXD: P1.4 U4.35 | length 1241.4
  Top Layer w6: v1(2595,2240) 2599.01,2240 2616.1,2257.09 U4.35
  Bottom Layer w6: P1.4 1590,2120 1710,2240 v1(2595,2240)
GND: C1.2 C2.2 C3.2 C4.2 C5.2 C6.2 C7.2 C8.2 C9.1 C10.1 C11.2 C12.2 C13.2 C14.2 C15.2 J2.N J.1 J.2 J.3 J.S1 J.S2 P1.1 P2.1 P3.1 P4.1 P5.1 P6.6 P7.1@1630,125 P7.3@3495,335 P9.3 P10.3 Q3.3 R1.1 R5.1 R6.1 R10.1 R16.2 S1.3 S2.3 U1.18 U1.20 U2.18 U2.20 U3.1 U3.2@1290,2095 U3.5 U3.6@560,2095 U3.7@2621.5,727.2 U4.1 U4.15 U4.38 U4.39_1 U4.39_2 U4.39_3 U4.39_4 U4.39_5 U4.39_6 U4.39_7 U4.39_8 U4.39_9 U4.39_10 U4.39_11 U4.39_12 U4.39_13 U4.39_14 U4.39_15 U4.39_16 U4.39_17 U4.39_18 U4.39_19 U4.39_20 U4.39_21 U5.1 U7.4 U7.7 | length 21620.1
  Top Layer w6: J2.N@215,2118.27 191.72,2094.99 191.72,1641.69 175.04,1625 C14.2 173.07,1324.43 187.5,1310 ; J2.N 229.1,2127.43 527.57,2127.43 560,2095 U3.5@560,1995 ; C15.2 240,1170 225,1155 143,1155 142,1156 142,1289.5 162.5,1310 187.5,1310 ; U5.1 187.5,1310 ; P5.1 P4.1 ; U3.2@1290,2095 U3.1@1290,1995 ; S1.3 1503,2488.91 ; P7.1@1630,125 1710,125 1751.06,166.06 R1.1@1751.06,680 ; v1(1650.5,1115) 1658.62,1106.88 1658.62,1068.62 ; U1.20 1658.62,1068.62 ; U1.18 1713.37,1019.37 1752,1058 ; C3.2 C2.2 1754,1060 1752,1058 ; C13.2 C9.1 ; U4.39_17 U4.39_4 U4.39_15 U4.39_5 ; U4.39_12 U4.39_1 ; U4.39_18 U4.39_5 ; U4.39_13 U4.39_5 ; R16.2 2207,1535 2145,1597 U4.15 2145,1926.18 U4.39_7 U4.39_20 U4.39_8 U4.39_21 U4.39_9 U4.39_19 U4.39_6 ; U3.7@2621.5,727.2 2602.59,727.2 2602,726.61 ; U3.5@2621.5,778.39 2603,778.39 2602,777.39 2602,726.61 ; C8.2 2950,712.5 2962.5,700 C4.2 3150,711.23 3196.62,711.23 3207.84,700 R10.1 R6.1 3482.5,700 ; P6.6 2602,658 2602,726.61 ; U7.7 3245,1700 3225,1720 3183.76,1720 3145,1758.76 U7.4 3145,2116 3282,2253 3282,2649.53 S2.3 3201.3,2646.93 C12.2 2800,2646.93 2787,2633.93 2787,2425 2769.09,2407.09 U4.38 2625.9,2407.09 U4.39_3 ; U2.20 3293.62,1068.62 3307,1082 3349.5,1082 ; U2.18 3330,1019.37 3330,1062.5 3349.5,1082 ; P7.3@3495,335 3495,687.5 3482.5,700 ; P10.3 3870,335 3855,350 3855,576.87 4116,837.87 J.1 J.2 J.3 ; P9.3 4295,567 4313.43,585.43 J.S1 4325.43,800.47 4325.43,835.27 4370,879.85 4370,1586.42 J.S2 4454.49,1642.99 4485.37,1673.87 4485.37,2473.05 Q3.3 ; P4.1 1305,735 1316.93,746.93 C1.2 1540,729 1512,729 1511,728 1511,650 1512,649 1568,649 1599,680 R5.1 R1.1@1751.06,680 ; P4.1 P2.1 P3.1 1070,1775 U3.1@1290,1995 ; U3.1@1290,1995 1290,1865 1335,1820 P1.1 1481,1859 1481,2466.91 1503,2488.91 ; 1503,2488.91 1503,2400 1515.5,2387.5 1547.5,2387.5 1560,2400 1561,2452 1607,2452 1634.14,2424.86 1634.14,2400 1647.22,2386.93 C11.2 1739,2386.93 C10.1 C9.1 ; 1658.62,1068.62 1670,1080 1730,1080 1752,1058 ; R1.1@1751.06,680 R1.1 2374,680 2375,681 C7.2 2466,710 2474.39,701.61 2558.5,701.61 2577,701.61 2602,726.61 ; C9.1 1960,2386.93 1980.16,2407.09 U4.1 2238.8,2407.09 2258.39,2387.5 U4.39_1 ; U4.39_1 U4.39_10 U4.39_2 U4.39_11 U4.39_3 ; U4.39_5 U4.39_16 U4.39_6 ; U4.39_6 U4.39_14 U4.39_3 ; 3349.5,1082 3501,1082 3504,1051 C6.2 3535.07,1049.93 3535.07,925.07 C5.2 3535,712.5 3522.5,700 3482.5,700
  Bottom Layer w6: U3.5@560,1995 U3.1@1290,1995 ; P2.1 v1(1650.5,1115) ; P6.6 3035,335 3495,335 P10.3 P9.3
gps_rx: J.27 P4.2 | length 4262.5
  Top Layer w6: J.27 4238.22,1349.69 4275,1312.9 v1(4275,1230)
  Bottom Layer w6: P4.2 928,777 845.5,777 831,762.5 831,695 903,623 3856.18,623 4322,1088.82 4322,1176.18 4275,1223.18 v1(4275,1230)
gps_tx: J.28 P4.3 | length 3930.7
  Top Layer w6: J.28 4235.5,1369.37 4302,1302.87 4302,1167 v1(4295,1160)
  Bottom Layer w6: P4.3 912,693 2116,693 2340,917 4111,917 4217,1023 4217,1082 v1(4295,1160)
IO0: R15.1 R18.2 U4.25 | length 1102.7
  Top Layer w6: U4.25 2900,1757.09 2917,1774.09 2917,2360.72 2939.53,2383.25 R15.1 2970,2420 2997,2447 3129,2447 3130,2446 R18.2
lidar_b_rx: J.21 P3.3 | length 3479.4
  Top Layer w6: v1(4085,1230) 4206.57,1230 4211.57,1235 J.21
  Bottom Layer w6: P3.3 1111,1239 3791,1239 3824,1272 4043,1272 v1(4085,1230)
lidar_b_tx: J.22 P3.2 | length 3345.1
  Top Layer w6: v1(4105.06,1291.12) 4135.33,1291.12 4175.19,1251.26 J.22
  Bottom Layer w6: P3.2 1113,1337 3253.87,1337 3260.37,1343.5 4052.68,1343.5 v1(4105.06,1291.12)
lidar_f_rx: J.23 P2.3 | length 3514.7
  Top Layer w6: v1(3842,1236) 3865,1213 4031.18,1213 4054.82,1236.63 4054.82,1279.05 4093.88,1318.12 4126.88,1318.12 4174.06,1270.94 J.23
  Bottom Layer w6: P2.3 908.53,1153.53 1608.29,1153.53 1608.82,1153 1631.18,1153 1644.18,1166 3551.29,1166 3577.52,1139.78 3697.65,1139.78 3727.97,1170.09 3776.09,1170.09 v1(3842,1236)
lidar_f_tx: J.24 P2.2 | length 3504.9
  Top Layer w6: v1(4020,1240) 4020,1271.97 4081.03,1333 4132.96,1333 4175.33,1290.63 J.24
  Bottom Layer w6: P2.2 1089,996 2018,996 2176,1154 3539.29,1154 3581.23,1112.06 3781.97,1112.06 3797.68,1127.78 3907.78,1127.78 v1(4020,1240)
MPU1_SCL: J.17 R2.2 U1.23 | length 2873.1
  Top Layer w6: U1.23 1611.38,1188.38 1628.5,1205.5 ; v1(1620,1180) 1620,1197 1628.5,1205.5 ; R2.2 1645,1222 1628.5,1205.5 ; v1(3605,1167) 3982.91,1167 4026.91,1123 4131.18,1123 4146.18,1138 4185.47,1138 4200.3,1152.83 J.17
  Bottom Layer w6: v1(1620,1180) 3592,1180 v1(3605,1167)
MPU1_SDA: J.18 R3.2 U1.24 | length 3528.9
  Top Layer w6: v1(1450,1397) 1450,1253.44 1462.5,1240.94 R3.2 1570.74,1240.94 1593,1218.68 1593,1043.46 U1.24 ; v1(4120,1150) 4177.78,1150 4200.3,1172.52 J.18
  Bottom Layer w6: v1(1450,1397) 1455,1402 4121.18,1402 4144.06,1379.12 4144.06,1194.07 4120,1170 v1(4120,1150)
MPU2_SCL: J.19 R8.2 U2.23 | length 1952.3
  Top Layer w6: v1(3150,1077) 3150,856.06 3109,897.06 3109,1214 3125,1230 R8.2 ; v1(3230,1115) 3230,1112.38 3245.38,1097 U2.23 ; v1(4030,1170) 4081.82,1170 4104.02,1192.2 J.19
  Bottom Layer w6: v1(3230,1115) 3188,1115 v1(3150,1077) 3154,1073 3961.18,1073 4030,1141.82 v1(4030,1170)
MPU2_SDA: J.20 R9.2 U2.24 | length 1287.8
  Top Layer w6: U2.24 3230.63,1049 3221.5,1049 3203,1067.5 3203,1212.22 3243.56,1252.78 3297.22,1252.78 3320,1230 R9.2 3525,1230 3545,1250 v1(3545,1270) ; v1(3633,1270) 3702,1201 4095.85,1201 4106.74,1211.89 J.20
  Bottom Layer w6: v1(3545,1270) v1(3633,1270)
NetC1_1: C1.1 U1.10 | length 379.7
  Top Layer w6: C1.1 1541,703 1660.5,703 1677,719.5 1677,829 1642.87,863.13 U1.10
NetC4_1: C4.1 U2.10 | length 358.3
  Top Layer w6: C4.1 3177.07,766.93 3208,736 3294,736 3308,750 3308,765.5 3277.87,795.63 U2.10
NetC12_1: C12.1 S2.1 | length 406.4
  Top Layer w6: C12.1 3174.37,2580 S2.1
NetC13_1: C13.1 S1.1 | length 396.2
  Top Layer w6: S1.1 1629.33,2621.93 C13.1
NetD1_1: D1.1 K1.A2 Q3.1 | length 490.4
  Top Layer w6: K1.A2@4186.22,2104.84 K1.A2@4186.22,2147.13
  Bottom Layer w6: K1.A2 4292.28,2240.91 D1.1 4410,2351.57 Q3.1 ; D1.1@4420,2255.91 D1.1@4429.28,2265.18
NetJ_38: J.38 P11.3 | length 3339.3
  Top Layer w6: v1(4105,1660) 4105,1622.82 4161.6,1566.22 J.38@4228.47,1566.22
  Bottom Layer w6: P11.3 2510,605 3858.94,605 4334,1080.06 4334,1209.18 4217.72,1325.46 4217.72,1504.28 4105,1617 v1(4105,1660)
NetJ_39: J.39 P11.2 | length 3692.1
  Top Layer w6: J.39 4232,1585.91 4239.75,1593.65 4239.75,1615.22 4225,1629.97 v1(4225,1700)
  Bottom Layer w6: P11.2 2136,229 2812.5,229 2830,246.5 2830,308 2915,393 3900,393 3914,407 3914,526 4224,836 4309.18,836 4370,896.82 4370,1512 4225,1657 v1(4225,1700)
NetJ_40: J.40 P11.1 | length 3601.1
  Top Layer w6: v1(4160,1700) 4160,1640 4194.41,1605.59 J.40
  Bottom Layer w6: P11.1 2024,319 2105,319 2124,300 2124,280 2162.53,241.47 2209.47,241.47 2519,551 3828,551 4346,1069 4346,1270.45 4237,1379.45 4237,1549.65 4160,1626.65 v1(4160,1700)
NetK1_COM: K1.COM P10.1 | length 2214.6
  Top Layer w6: K1.COM@3950,2026.1 4272,1704.1 4272,1624.79 4358,1538.79 4358,884.82 4279.08,805.89 4279.08,429.08 P10.1
NetK1_NC: K1.NC P9.1 | length 3414.1
  Top Layer w6: P9.1 v1(4483,323)
  Bottom Layer w6: K1.NC@3713.78,2585.16 3802.62,2674 4468,2674 4483,2659 v1(4483,323)
NetK1_NO: K1.NO P7.1@3495,135 P8.2 | length 4111.3
  Top Layer w6: P7.1@3495,135 3534,96 4079,96 4273,290 4325,290 4390,355 4390,1526 4505,1641 4505,2700 4485,2720 4250,2720 4169.62,2639.62 4169.62,2598.56 K1.NO
  Bottom Layer w6: P8.2 3260,135 P7.1@3495,135
NetQ3_2: Q3.2 R20.2 | length 470.3
  Top Layer w6: R20.2 4295,2375 Q3.2
NetR1_2: R1.2 U1.11 | length 237.8
  Top Layer w6: U1.11 1658.62,884 1723,819.62 1724,739.06 R1.2
NetR4_2: R4.2 U1.22 | length 276.8
  Top Layer w6: U1.22 1623.5,1091.63 1623.5,1139.24 1724.26,1240 R4.2
NetR5_2: R5.2 U1.9 | length 201.9
  Top Layer w6: U1.9 1627.13,740.93 1629,739.06 R5.2
NetR6_2: R6.2 U2.11 | length 209.9
  Top Layer w6: U2.11 3293.62,804.43 3339,759.06 R6.2
NetR7_2: R7.2 U2.22 | length 192
  Top Layer w6: U2.22 3262.13,1230 R7.2
NetR10_2: R10.2 U2.9 | length 161.3
  Top Layer w6: U2.9 3262.13,761.93 R10.2
NetR16_1: R16.1 U4.24 | length 182.7
  Top Layer w6: R16.1 U4.24
NetR18_1: R18.1 S2.2 | length 158.9
  Top Layer w6: v1(3015,2420) R18.1
  Bottom Layer w6: S2.2 3015,2483.47 v1(3015,2420)
NetR19_1: R19.1 S1.2 | length 704.6
  Top Layer w6: R19.1 1525.94,2443.42 1673.52,2591 1933,2591 1934,2592 1934,2651.5 1878.33,2707.17 S1.2
PPM_Switch_Sig: J.35 R20.1 | length 1268.6
  Top Layer w6: J.35 4084.88,1507.17 3850,1742.05 3850,2035 3905,2090 3985,2090 4035,2040 4100,2040 4160,1980 R20.1
PWM_ALI1: J.32 P6.2 | length 2889
  Top Layer w6: J.32 4239,1448.11 4240,1449.11 4240,1503.18 4278.82,1542 4301.18,1542 4346,1497.18 4346,1093.46 4300,1047.46 v1(4300,865)
  Bottom Layer w6: P6.2 2618.53,241.47 2712.5,241.47 2733,261.97 2733,302 2910,479 3817,479 4203,865 v1(4300,865)
PWM_ALI2: J.33 P6.1 | length 2745.6
  Top Layer w6: P6.1 2556,204 3348,204 3418,274 3534,274 3755,495 v1(3755,1140) ; v1(3960,1245) 3960,1377.8 4050,1467.8 J.33
  Bottom Layer w6: v1(3755,1140) 3855,1140 v1(3960,1245)
PWM_ELV: J.30 P6.4 | length 2430.4
  Top Layer w6: v1(3887,420) 4175,708 4221.18,708 4259,745.82 4259,1025.82 4334,1100.82 4334,1315.64 4240.9,1408.74 J.30
  Bottom Layer w6: P6.4 2920,420 v1(3887,420)
PWM_ESC: J.29 P6.5 | length 2161.8
  Top Layer w6: P6.5 2926,234 3029,234 3445,650 v1(3465,650) ; J.29 4240.9,1389.06 4322,1307.95 4322,1146 4280,1104 v1(4280,1085)
  Bottom Layer w6: v1(3465,650) 3860.97,650 4229.12,1018.15 4229.12,1034.12 v1(4280,1085)
PWM_RUD: J.31 P6.3 | length 2630.5
  Top Layer w6: J.31 4240.9,1428.43 4290,1477.53 v1(4290,1515)
  Bottom Layer w6: P6.3 2937,537 3858,537 4358,1037 4358,1436 4290,1504 v1(4290,1515)
PYNQ_PPM: J.34 P8.1 | length 2032.9
  Top Layer w6: P8.1 3312,265 3341,294 3534,294 3570,330 3570,1254.48 3803,1487.48 J.34
TEL_APM_RXD_U2: P7.3@1630,325 U4.27 | length 4551.8
  Top Layer w6: v1(2620,1860) 2701.73,1860 U4.27
  Bottom Layer w6: P7.3@1630,325 1575,325 1495,245 690,245 595,340 595,1485 825,1715 2100,1715 2285,1900 2575,1900 2615,1860 v1(2620,1860)
TEL_APM_TXD_U2: P7.2@1630,225 U4.28 | length 4574.9
  Top Layer w6: v1(2620,1930) 2640,1910 2701.73,1910 U4.28
  Bottom Layer w6: P7.2@1630,225 675,225 575,325 575,1485 825,1735 2075,1735 2270,1930 v1@2615,1930
TEL_SENS_RXD_SWU2: J.12 U4.33 | length 2472.2
  Top Layer w6: U4.33 2779.41,2157.09 2837,2099.5 2837,2008.82 2799,1970.82 v1(2799,1890) ; v1(4120,1060) 4125.59,1054.41 J.12
  Bottom Layer w6: v1(2799,1890) 3116,1573 4069,1573 4190,1452 4190,1130 v1(4120,1060)
TEL_SENS_TXD_SWU2: J.13 U4.36 | length 2933.5
  Top Layer w6: U4.36 2587.09,2307.09 2555,2275 2555,1869 2651,1773 2651,1591 3069,1173 v1(3069,975) ; v1(4065,965) 4065,1043.18 4108.82,1087 4182,1087 4194.91,1074.09 J.13
  Bottom Layer w6: v1(3069,975) 3479.89,975 3496.89,958 4058,958 v1(4065,965)
TEL_ZYNQ_RXD_SWU1: J.10 U4.30 | length 3267.3
  Top Layer w6: U4.30 2717.56,2020 v1(2810,2020) ; v1(4210,735) 4210,798.49 4239.75,828.24 4239.75,1010.25 4234.96,1015.04 J.10
  Bottom Layer w6: v1(2810,2020) 2810,1963.09 3165.09,1608 4015.72,1608 4078,1670.28 4078,1671.18 4133.82,1727 4236.18,1727 4382,1581.18 4382,841 4276,735 v1(4210,735)
TEL_ZYNQ_TXD_SWU1: J.11 U4.31 | length 2534.2
  Top Layer w6: v1(2625,2020) 2662.09,2057.09 U4.31 ; v1(4120,1000) 4140,1000 4174.72,1034.72 J.11
  Bottom Layer w6: v1(2625,2020) 2654,2020 2751,1923 2818,1923 3151,1590 4115.03,1590 4204,1501.03 4204,1084 v1(4120,1000)
VIN: J2.P J.5 J.6 U3.3@1290,2415 U3.4@1290,2515 | length 8122.3
  Top Layer w6: J2.P@190,2380 J2.P ; J.5 J.6
  Top Layer w10: J2.P@190,2380 55,2380 30,2355 30,1190 550,670 550,240 630,160 1105,160 1220,275 v1(1220,655) ; v1(3990,865) 4070.32,865 4121.93,916.61 J.5
  Bottom Layer w6: v1(1220,655) v1@1230,645
  Bottom Layer w10: v1@1230,645 3395,645 3502.13,752.13 3877.13,752.13 v1(3990,865)
  Bottom Layer w15: J2.P 450,2640 1165,2640 1290,2515 U3.3@1290,2415
pads on no net: J.4 J.14 P7.2@3495,235 P9.2 P10.2 S1.4 S2.4 U1.2 U1.3 U1.4 U1.5 U1.6 U1.7 U1.12 U1.14 U1.15 U1.16 U1.17 U1.19 U1.21 U1.25 U2.2 U2.3 U2.4 U2.5 U2.6 U2.7 U2.12 U2.14 U2.15 U2.16 U2.17 U2.19 U2.21 U2.25 U4.4 U4.5 U4.6 U4.7 U4.8 U4.9 U4.10 U4.11 U4.12 U4.13 U4.14 U4.16 U4.17 U4.18 U4.19 U4.20 U4.21 U4.22 U4.23 U4.26 U4.29 U4.32 U4.37 U5.4 U7.1 U7.2 U7.3

## Polygon pours and split planes (outlines as drawn)
GND on Bottom Layer "GND_L02_P006" (solid, pour order 6): 0,2750 4515,2750 4515,20 0,20
no net on Bottom Layer "NONET_L02_P002" (solid, pour order 2): 0,2750
no net on Bottom Layer "NONET_L02_P001" (solid, pour order 1): 0,170
GND on Top Layer "GND_L01_P003" (solid, pour order 3): 5,2755 4515,2755 4515,15 0,15 0,2755

## Silkscreen, mask and mechanical layers (free items; w line width, h text height)
Top Overlay:
  lines w10: 0,1090 510,1090 ; 509.8,10 1420,10 1420,605 ; 510,0 510,1090 ; 1415,2760 1415,1690 1415,1505 ; 1420,1690 510,1690 510,1090 ; 1995,1500 1995,600 ; 3040,1500 3040,600 ; 3600,1750 4515,1750 ; 3610,2760 3610,1970 ; 4519.14,599.14 3604.14,599.14 ; 1415,1505 1420,1500 3090,1500 ; 1415,1505 1415,610 1425,600 1995,600 ; 1995,600 3040,600 ; 3040,600 3045,595 3600,595 3604.14,599.14 ; 3090,1500 3090,1964.14 3095.86,1970 3610,1970 ; 3090,1500 3604.14,1500 ; 3604.14,599.14 3604.14,1500 ; 3604.14,1500 3610,1505.86 3610,1970
  text "PWR" at 425,2645 h60
  text "ESP32" at 1440,1520 h60
  text "IMU1" at 1430,1410 h60
  text "Barometer" at 2030,1405 h60
  text "IMU2" at 3065,1405 h60
  text "V RX TX G" at 750,1345.87 h80
  text "Bottom Lidar" at 760,1280 h60
  text "V RX TX G" at 750,970.87 h80
  text "Front Lidar" at 780,910 h60
  text "V TX RX G" at 745,605.87 h80
  text "GPS" at 850,555 h60
  text "Control Signals" at 2610,499.99 h60
  text "External_Sensors" at 1335,490 h60 r90
  text "10/2022" at 250,360 h60 r90
  text "V SCL SDA G" at 690,275.87 h80
  text "COMPASS/MAG" at 720,220 h60
  text "PYNQ_GPIO" at 1925.03,160.65 h60
  text "A  A  R  E  T  G" at 2495,155.87 h80
  text "APM_UART" at 1809.35,140 h60 r90
  text "PPM APM" at 4200,125.03 h60 r90
  text "S V G" at 3643.92,120 h100 r90
  text "S V G" at 4133.92,115 h100 r90
  text "S V G" at 4443.92,110 h100 r90
  text "G TX RX V" at 1754.13,105 h80 r90
  text "PYNQ_PWM" at 2575.03,80.65 h60
  text "PYNQ Extension V0.2" at 125,75 h55 r90
  text "PPM Encoder" at 3714.38,70.03 h60 r90
  text "PPM Receiver" at 4499.38,60.02 h60 r90
  text "PYNQ PPM Disable" at 3362.52,35.02 h50 r90
Mechanical 1:
  lines w0.5: 0.25,0.25 4527.81,0.25 4527.81,2756.16 0.25,2756.16 0.25,0.25

## Text inside footprints (layer, text, board x,y; h text height)
U3: Top Overlay "IN-" at 1160.31,2075 h39.37 r270; Top Overlay "IN+" at 1160.31,2500 h39.37 r270; Top Overlay "OUT-" at 642.99,2117.01 h39.37 r270; Top Overlay "OUT+" at 647.99,2532.01 h39.37 r270
U4: Mechanical 13 "ANTENNA" at 2133.78,2554.33 h70